# EAGLE board hft (EAGLE 6.5.0)
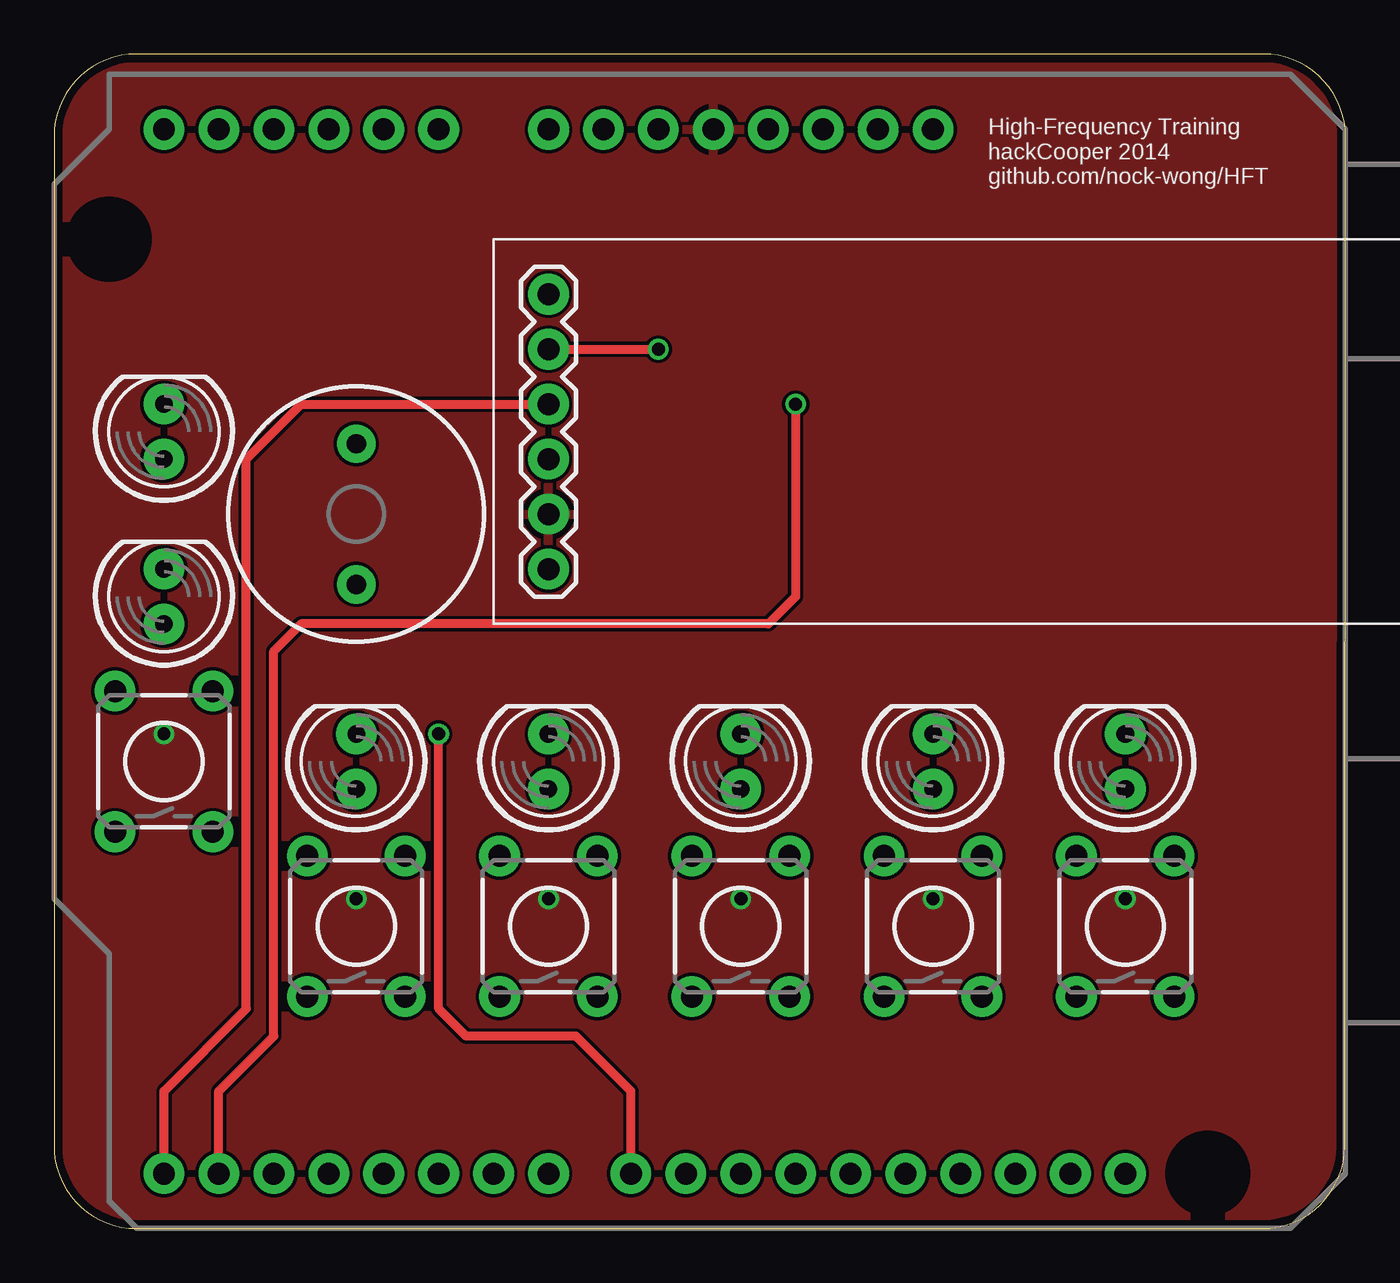
[diagram p0: board, top side]
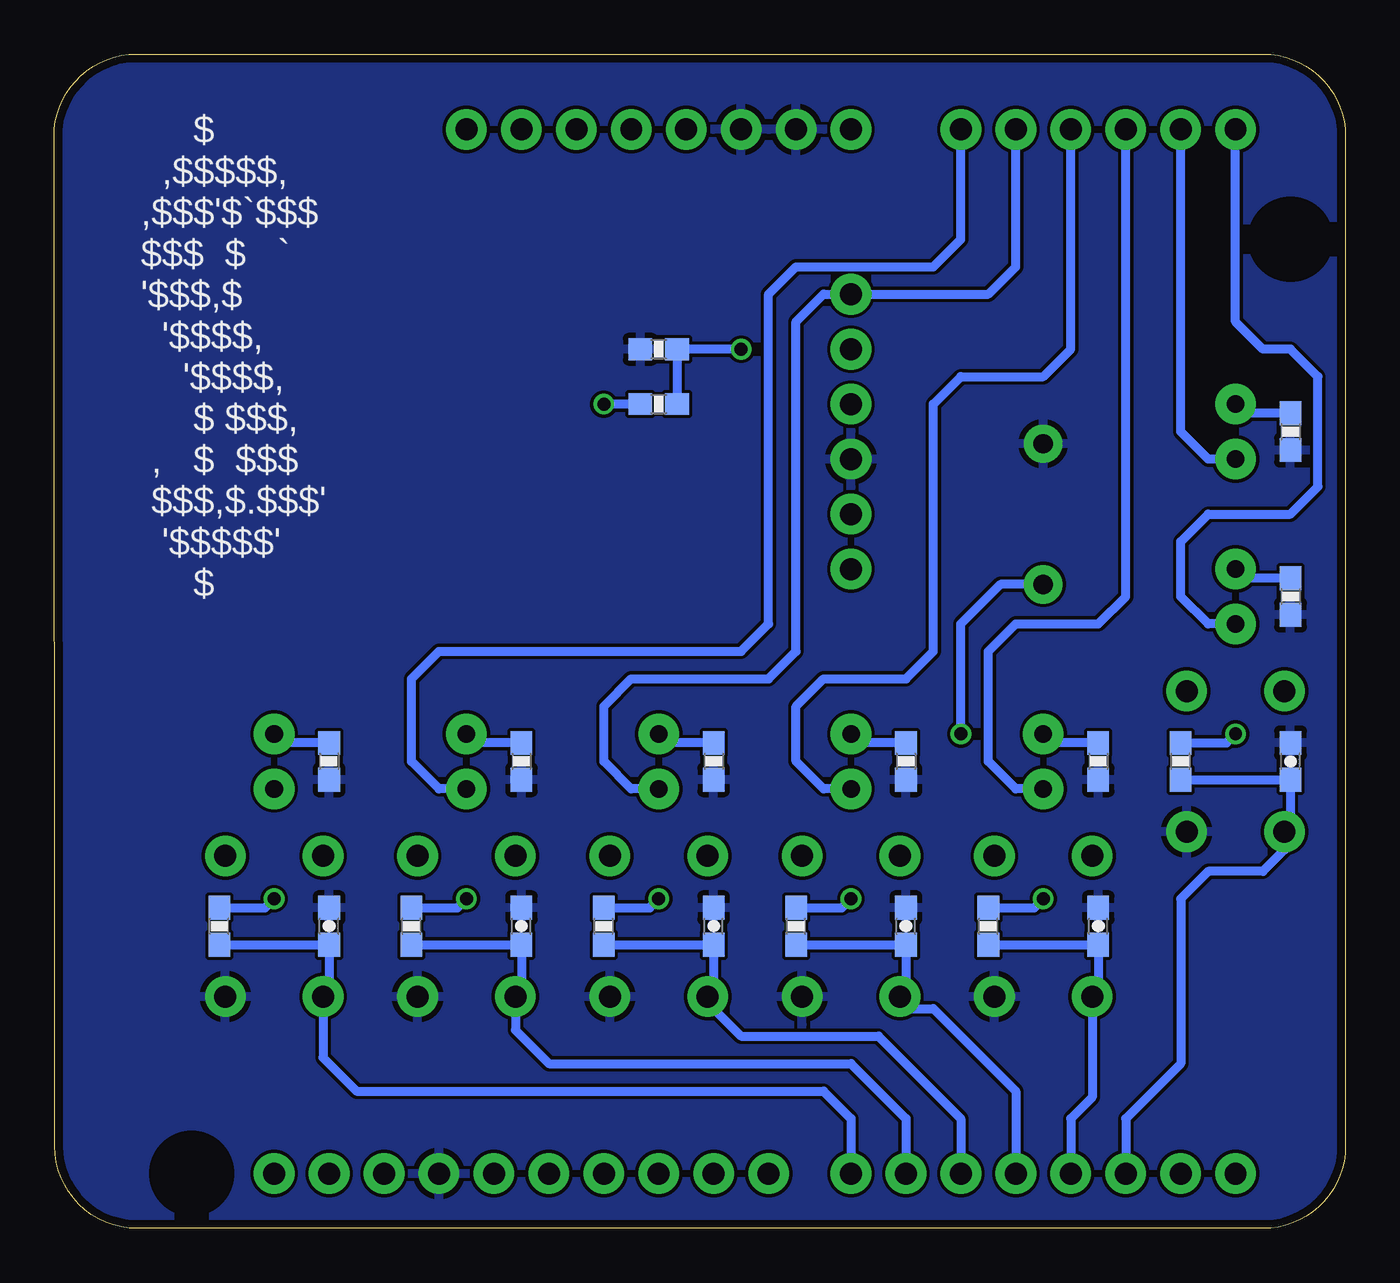
[diagram p1: board, bottom side, seen from below]

Size 59.71 x 54.28 mm. Coordinates in mm from the lower left corner, seen from the top.
Outline: 55.9,54.28 3.81,54.28 arc90 0,50.47 0,3.81 arc90 3.81,0 55.86,0 arc90 59.67,3.81 59.71,50.47 arc90 55.9,54.28
Copper layers (1*16): Top 0.0356mm / dielectric 1.5011mm / Bottom 0.0356mm
Design rules "LaenPCBOrder": minimum track width 6mil, minimum drill 13mil, track to track 6mil, track to pad 6mil, pad to pad 6mil, via to via 6mil, smd to smd 6mil, copper to edge 15mil, drill to drill 6mil, minimum pad ring 7mil, minimum via ring 7mil, stop-mask expansion 4mil, vias tented up to drill 0mil, thermal gap 10mil

## Footprints (pad centres in the part's own frame; a part is rotated, then mirrored left to right if it is on the bottom)
UNO_R3_SHIELD = drill 1.016 pad 1.88: 3.3V 50.8,26.67; 5V 50.8,29.21; A0 50.8,41.91; A1 50.8,44.45; A2 50.8,46.99; A3 50.8,49.53; A4 50.8,52.07; A5 50.8,54.61; AREF 2.54,15.24; D2 2.54,49.53; D3 2.54,46.99; D4 2.54,44.45; D5 2.54,41.91; D6 2.54,39.37; D7 2.54,36.83; D8 2.54,33.02; D9 2.54,30.48; D10 2.54,27.94; D11 2.54,25.4; D12 2.54,22.86; D13 2.54,20.32; GND@0 50.8,31.75; GND@1 50.8,34.29; GND@2 2.54,17.78; IOREF 50.8,21.59; NC 50.8,19.05; RES 50.8,24.13; RX 2.54,54.61; SCL 2.54,10.16; SDA 2.54,12.7; TX 2.54,52.07; VIN 50.8,36.83
0603-CAP = smd 1.1 x 1: 1 -0.85,0; 2 0.85,0
LED5MM = drill 0.813 pad 1.88: A -1.27,0; K 1.27,0
0603-RES = smd 1.1 x 1: 1 -0.85,0; 2 0.85,0
TACTILE-PTH = drill 1.016 pad 1.88: 1 -3.251,2.261; 2 3.251,2.261; 3 -3.251,-2.261; 4 3.251,-2.261
BUZZER-12MM = drill 0.9 pad 1.778: + 3.25,0; - -3.25,0
HC-06_BREAKOUT = drill 1.016 pad 1.88: 1 -6.35,0; 2 -3.81,0; 3 -1.27,0; 4 1.27,0; 5 3.81,0; 6 6.35,0

## Placement (x,y rotation side)
ARD  ARDUINO_R3_SHIELD  [UNO_R3_SHIELD]  59.69,0 90 top
C1  [0603-CAP]  2.54,21.59 90 bottom
C2  [0603-CAP]  11.43,13.97 90 bottom
C3  [0603-CAP]  20.32,13.97 90 bottom
C4  [0603-CAP]  29.21,13.97 90 bottom
C5  [0603-CAP]  38.1,13.97 90 bottom
C6  [0603-CAP]  46.99,13.97 90 bottom
LED1  [LED5MM]  13.97,21.59 90 top
LED2  [LED5MM]  22.86,21.59 90 top
LED3  [LED5MM]  31.75,21.59 90 top
LED4  [LED5MM]  40.64,21.59 90 top
LED5  [LED5MM]  49.53,21.59 90 top
LED6  [LED5MM]  5.08,36.83 90 top
LED7  [LED5MM]  5.08,29.21 90 top
R1  [0603-RES]  11.43,21.59 270 bottom
R2  [0603-RES]  7.62,21.59 90 bottom
R3  [0603-RES]  20.32,21.59 270 bottom
R4  [0603-RES]  16.51,13.97 90 bottom
R5  [0603-RES]  29.21,21.59 270 bottom
R6  [0603-RES]  25.4,13.97 90 bottom
R7  [0603-RES]  38.1,21.59 270 bottom
R8  [0603-RES]  34.29,13.97 90 bottom
R9  [0603-RES]  46.99,21.59 270 bottom
R10  [0603-RES]  43.18,13.97 90 bottom
R11  [0603-RES]  2.54,36.83 270 bottom
R12  [0603-RES]  52.07,13.97 90 bottom
R13  [0603-RES]  2.54,29.21 270 bottom
R14  [0603-RES]  31.75,38.1 0 bottom
R15  [0603-RES]  31.75,40.64 180 bottom
S1  SWITCH-MOMENTARY-2PTH  [TACTILE-PTH]  5.08,21.59 90 top
S2  SWITCH-MOMENTARY-2PTH  [TACTILE-PTH]  13.97,13.97 90 top
S3  SWITCH-MOMENTARY-2PTH  [TACTILE-PTH]  22.86,13.97 90 top
S4  SWITCH-MOMENTARY-2PTH  [TACTILE-PTH]  31.75,13.97 90 top
S5  SWITCH-MOMENTARY-2PTH  [TACTILE-PTH]  40.64,13.97 90 top
S6  SWITCH-MOMENTARY-2PTH  [TACTILE-PTH]  49.53,13.97 90 top
SG1  BUZZERPTH  [BUZZER-12MM]  13.97,33.02 270 top
U$8  HC-06  [HC-06_BREAKOUT]  22.86,36.83 270 top

## Library data of the parts
ARD C1-C6 LED1-LED7 R1-R15 S1-S6 SG1 U$8 = hft

## Nets
+5V: ARD.5V R2.2 R4.2 R6.2 R8.2 R10.2 R12.2 U$8.5
ARD-RX: ARD.RX U$8.3
ARD-TX: ARD.TX R14.1
B0: ARD.D2 C1.1 R2.1 S1.1
B1: ARD.D3 C2.1 R4.1 S2.1
B2: ARD.D4 C3.1 R6.1 S3.1
B3: ARD.D5 C4.1 R8.1 S4.1
B4: ARD.D6 C5.1 R10.1 S5.1
B5: ARD.D7 C6.1 R12.1 S6.1
BL-RX: R14.2 R15.1 U$8.2
GND: ARD.GND@0 ARD.GND@1 ARD.GND@2 C1.2 C2.2 C3.2 C4.2 C5.2 C6.2 R1.2 R3.2 R5.2 R7.2 R9.2 R11.2 R13.2 R15.2 S1.3 S2.3 S3.3 S4.3 S5.3 S6.3 SG1.- U$8.4
LED0: ARD.A3 LED1.A
LED1: ARD.A2 LED2.A
LED2: ARD.A1 LED3.A
LED3: ARD.A0 LED4.A
LED4: LED5.A
LED5: ARD.A4 LED6.A
LED6: ARD.A5 LED7.A
N$1: LED1.K R1.1
N$2: LED2.K R3.1
N$3: LED3.K R5.1
N$4: LED4.K R7.1
N$5: LED5.K R9.1
N$6: LED6.K R11.1
N$12: LED7.K R13.1
N$21: ARD.D10
N$22: ARD.D11
N$23: ARD.D12
N$24: ARD.D13
SPK: ARD.D8 SG1.+

## Tracks (layer width: path | path; a pad name or v marks a point on that pad's centre or on a via)
+5V  (via drill 0.6)
  Bottom 0.406: R2.2 5.5,22.44 v5.08,22.86 | R4.2 14.39,14.82 v13.97,15.24 | R6.2 23.28,14.82 v22.86,15.24 | R8.2 32.17,14.82 v31.75,15.24 | R10.2 41.06,14.82 v40.64,15.24 | R12.2 49.95,14.82 v49.53,15.24
  pour Top: -1.27,-2.54 -1.27,55.88 60.96,55.88 60.96,-2.54
ARD-RX
  Top 0.406: ARD.RX 5.08,6.35 8.89,10.16 8.89,35.56 11.43,38.1 U$8.3
ARD-TX  (via drill 0.6)
  Top 0.406: ARD.TX 7.62,6.35 10.16,8.89 10.16,26.67 11.43,27.94 33.02,27.94 34.29,29.21 v34.29,38.1
  Bottom 0.406: R14.1 v34.29,38.1
B0
  Bottom 0.406: ARD.D2 10.16,5.08 7.62,7.62 7.62,15.24 6.35,16.51 3.81,16.51 2.82,17.5 S1.1 2.54,18.62 C1.1 R2.1
B1
  Bottom 0.406: R4.1 C2.1 11.43,11 S2.1 11.71,6.07 12.7,5.08 ARD.D3
B2
  Bottom 0.406: ARD.D4 15.24,6.35 19.05,10.16 20.04,10.16 S3.1 20.32,11 C3.1 R6.1
B3
  Bottom 0.406: ARD.D5 17.78,5.08 21.59,8.89 27.94,8.89 29.49,10.44 S4.1 29.21,11 C4.1 R8.1
B4
  Bottom 0.406: ARD.D6 20.32,5.08 22.86,7.62 36.83,7.62 38.38,9.17 S5.1 38.1,11 C5.1 R10.1
B5
  Bottom 0.406: ARD.D7 22.86,5.08 24.13,6.35 45.72,6.35 47.27,7.9 S6.1 46.99,11 C6.1 R12.1
BL-RX  (via drill 0.6)
  Top 0.406: U$8.2 v27.94,40.64
  Bottom 0.406: v27.94,40.64 R15.1 R14.2
GND
  pour Bottom: -1.27,-2.54 -1.27,55.88 60.96,55.88 60.96,-2.54
LED0
  Bottom 0.406: LED1.A 15.24,20.32 16.51,21.59 16.51,26.67 15.24,27.94 11.43,27.94 10.16,29.21 ARD.A3
LED1
  Bottom 0.406: LED2.A 24.13,20.32 25.4,21.59 25.4,24.13 24.13,25.4 20.32,25.4 19.05,26.67 19.05,38.1 17.78,39.37 13.97,39.37 12.7,40.64 ARD.A2
LED2
  Bottom 0.406: LED3.A 33.02,20.32 34.29,21.59 34.29,24.13 33.02,25.4 26.67,25.4 25.4,26.67 25.4,41.91 24.13,43.18 16.51,43.18 15.24,44.45 ARD.A1
LED3
  Bottom 0.406: LED4.A 41.91,20.32 43.18,21.59 43.18,25.4 41.91,26.67 27.94,26.67 26.67,27.94 26.67,43.18 25.4,44.45 19.05,44.45 17.78,45.72 ARD.A0
LED5
  Bottom 0.406: LED6.A 6.35,35.56 7.62,36.83 ARD.A4
LED6
  Bottom 0.406: LED7.A 6.35,27.94 7.62,29.21 7.62,31.75 6.35,33.02 2.54,33.02 1.27,34.29 1.27,39.37 2.54,40.64 3.81,40.64 5.08,41.91 ARD.A5
N$1
  Bottom 0.406: R1.1 13.55,22.44 LED1.K
N$2
  Bottom 0.406: R3.1 22.44,22.44 LED2.K
N$3
  Bottom 0.406: R5.1 31.33,22.44 LED3.K
N$4
  Bottom 0.406: R7.1 40.22,22.44 LED4.K
N$5
  Bottom 0.406: R9.1 49.11,22.44 LED5.K
N$6
  Bottom 0.406: R11.1 4.66,37.68 LED6.K
N$12
  Bottom 0.406: R13.1 4.66,30.06 LED7.K
SPK  (via drill 0.6)
  Top 0.406: ARD.D8 26.67,6.35 24.13,8.89 19.05,8.89 17.78,10.16 v17.78,22.86
  Bottom 0.406: v17.78,22.86 17.78,27.94 15.95,29.77 SG1.+

## Text on the board
tPlace: High-Frequency Training / hackCooper 2014 / github.com/nock-wong/HFT
bPlace: $ / ,$$$$$, / ,$$$'$`$$$ / $$$ $ ` / '$$$,$ / '$$$$, / '$$$$, / $ $$$, / , $ $$$ / $$$,$.$$$' / '$$$$$' / $